# Altium PCB FPGA_Board.PcbDoc (part 8 of 10)
Units mm, origin at the board's own origin, x right, y up, seen from the top; angles counter-clockwise.
Board outline 103.63 x 86.08 mm, 2 copper layers (Top Layer, Bottom Layer); 109 components, 200 nets, 667 pads, 237 vias.
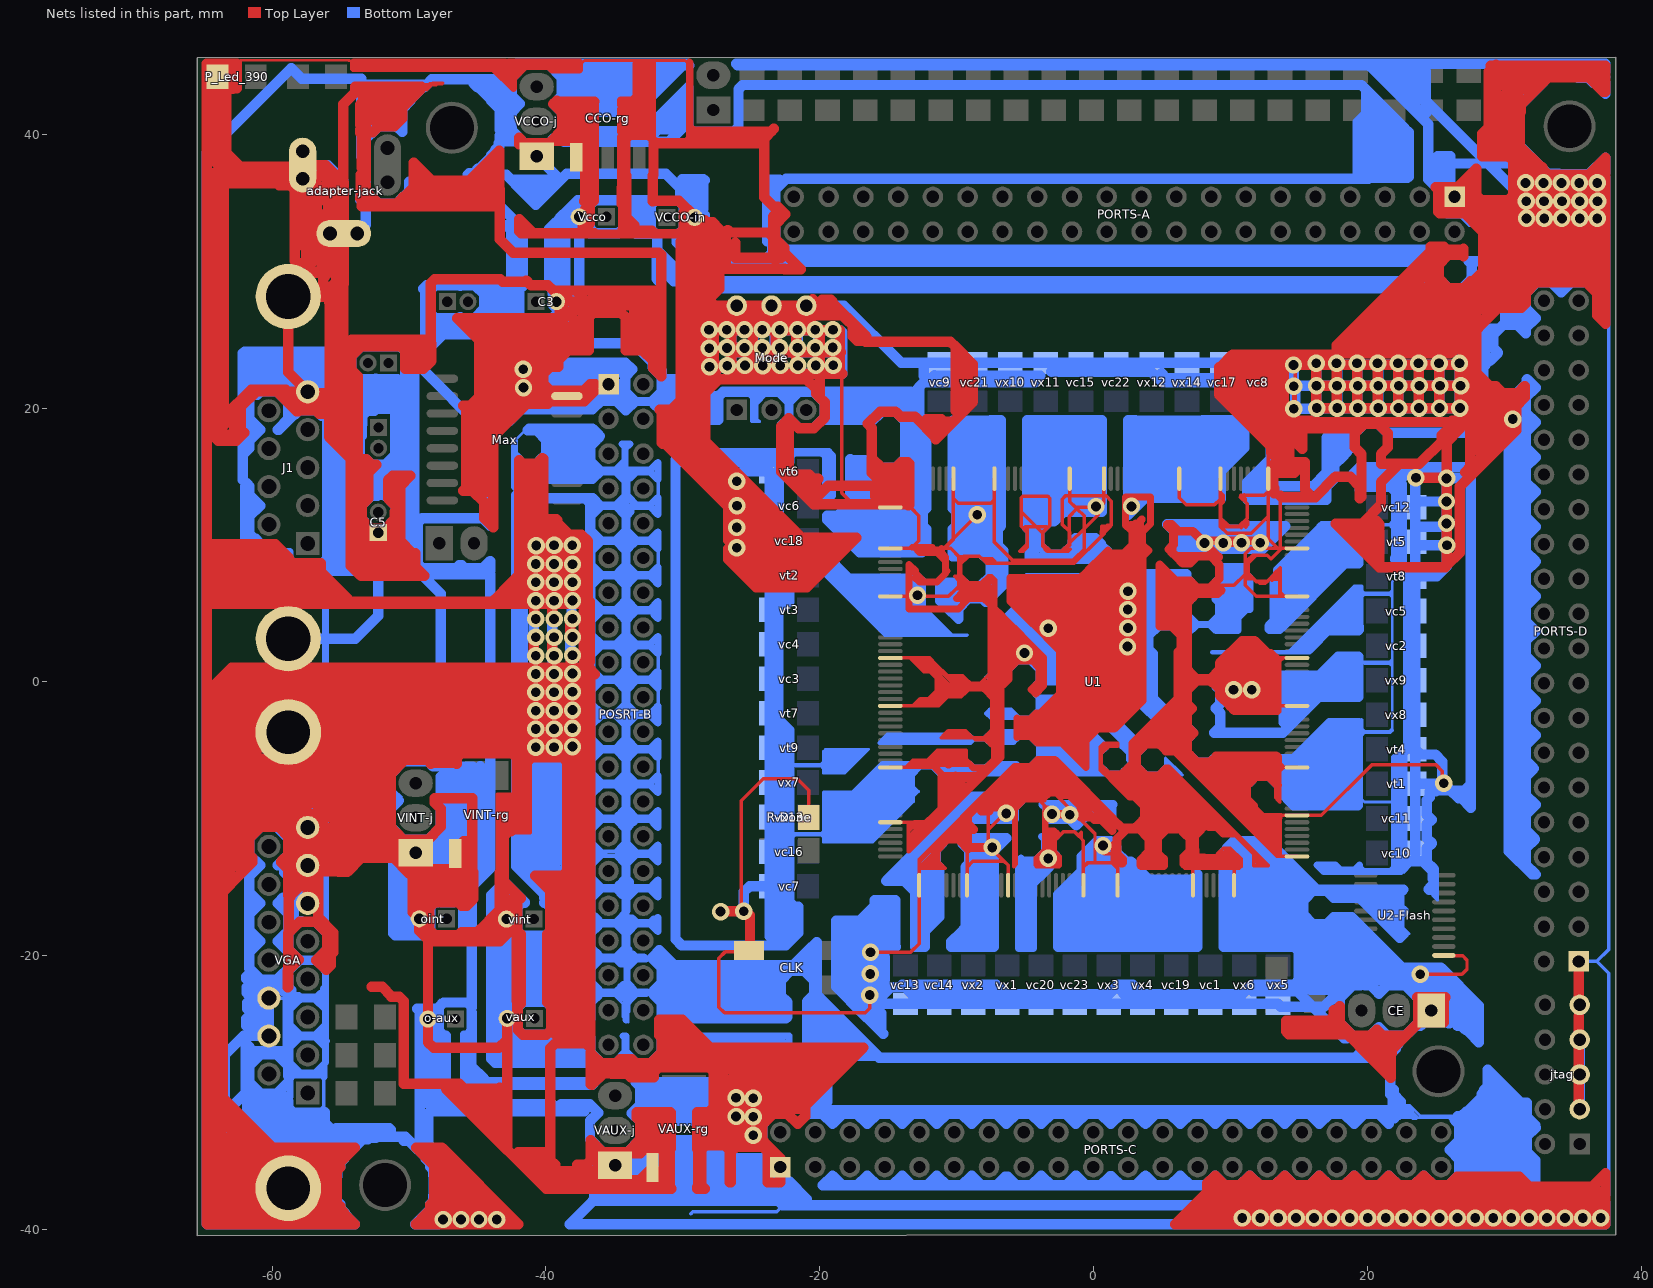
[diagram p8: the nets of this part, all layers, seen from the top]

## Via types
v1: diameter 1.27, hole 0.711, Top Layer to Bottom Layer, 237 vias

## Nets (pads, with @x,y where several pads share a name; then routed paths per layer and width w, separated by ;. In a path a pad name is that pad's centre, name@x,y a point inside that pad or via, vN(x,y) a via of type N, cw(c..) or ccw(c..) an arc to the next point about the centre after c; other vN are vias at no path point) (continued)
GND: (continued)
  Bottom Layer w0.762: -25.08,-35.398 -24.468,-34.786 ; -25.073,21.199 -24.078,21.199 ; -25.073,21.199 -24.731,20.857 -24.731,20.546 -24.078,21.199 ; v1@-24.885,25.675 v1@-23.295,25.675 ; v1@-24.885,25.675 -24.855,25.645 -24.855,24.088 ; v1@-24.858,-32.99 -24.858,-32.013 v1@-24.858,-31.852 ; v1@-24.858,-31.852 v1@-24.858,-31.82 ; v1@-24.858,-31.852 -24.89,-31.82 v1@-24.858,-31.82 ; -24.855,22.5 -24.855,24.088 ; -24.855,22.5 -23.235,22.5 ; -24.855,24.088 v1@-23.295,24.088 ; -24.707,-35.77 -24.386,-36.092 ; -24.707,-35.77 -23.723,-34.786 -24.468,-34.786 ; -24.686,-36.392 -24.386,-36.092 ; -24.686,-36.392 -25.086,-36.792 -33.035,-36.792 -33.401,-36.426 -34.62,-36.426 -34.62,-36.662 -34.293,-36.989 -33.468,-36.989 -33.193,-37.264 -24.706,-37.264 -24.706,-37.25 -23.967,-36.511 ; -24.386,-36.092 -23.967,-36.511 ; -24.144,-21.792 -23.611,-21.259 ; -24.144,-21.792 -24.677,-22.325 -29.848,-22.325 -29.762,-22.411 -29.762,-22.757 -24.216,-22.757 -24.144,-22.685 -24.144,-21.792 ; -24.144,-21.792 -24.144,-21.432 -24.475,-21.763 -30.496,-21.763 -30.395,-21.864 -30.395,-23.06 -30.151,-23.304 -23.582,-23.304 -23.611,-23.275 -23.611,-21.259 ; -24.078,21.199 -22.972,21.199 ; -23.967,-36.511 -23.672,-36.216 -23.554,-36.334 -23.122,-36.334 -23.122,-36.386 -23.607,-36.871 ; -23.967,-36.511 -23.607,-36.871 ; vc7.2@-23.65,-14.92 -23.65,-18.563 -23.42,-18.793 -23.341,-18.714 -22.945,-18.714 -22.945,-15.988 -22.498,-16.435 ; vc7.2@-23.65,-14.92 vc16.2@-23.65,-12.395 vx13.1@-23.65,-9.871 vx7.1@-23.65,-7.346 vt9.1@-23.65,-4.822 vt7.1@-23.65,-2.297 vc3.2@-23.65,0.228 vc4.2@-23.65,2.752 vt3.1@-23.65,5.277 vt2.1@-23.65,7.801 vc18.2@-23.65,9.825 ; vc18.2@-23.65,9.825 vc18.2@-23.65,10.326 vc18.2@-23.65,11.225 ; vc18.2@-23.65,11.225 vc6.2@-23.65,12.85 ; -23.611,-21.259 -23.026,-20.674 ; -23.611,-21.259 -23.611,-21.086 -23.683,-21.014 -31,-21.014 -30.986,-21.028 -30.986,-23.348 -30.266,-24.068 -30.165,-23.967 -22.948,-23.967 -22.79,-23.809 -22.79,-23.693 -23.294,-23.189 -23.28,-23.175 -23.28,-22.408 ; -23.607,-36.871 -23.423,-37.054 -23.241,-37.236 -23.409,-37.236 -23.522,-37.349 -22.882,-37.349 -22.455,-37.349 ; -23.607,35.609 -23.234,35.982 ; -23.607,35.609 -23.859,35.357 -23.859,32.185 -23.607,32.437 -23.607,35.609 ; -23.607,35.609 -23.607,36.677 -22.961,36.677 -23.234,36.404 -23.234,35.982 ; v1@-23.295,24.088 v1@-21.615,24.088 ; v1@-23.295,24.088 v1@-23.295,25.675 ; v1@-23.295,24.088 -23.295,22.56 -23.235,22.5 ; v1@-23.295,25.675 v1@-21.705,25.675 ; -23.28,-22.408 -23.28,-21.568 -22.386,-20.674 ; -23.28,-22.408 -22.856,-21.984 ; -23.235,22.5 v1@-21.615,22.5 ; -23.234,31.989 -23.234,35.982 ; -23.234,31.989 -23.234,31.812 -22.512,31.09 ; -23.234,31.989 -22.887,31.989 -22.453,31.555 24.075,31.555 ; -23.234,31.989 -23.494,31.989 -23.494,31.315 -23.691,31.118 -23.663,31.09 -22.512,31.09 ; -23.234,35.982 -22.453,36.763 20.047,36.763 20.101,36.817 22.923,36.817 23.007,36.901 22.7,37.208 22.7,37.322 ; vt7.1@-23.036,-2.72 vt3.1@-23.036,5.195 ; vt7.1@-23.036,-2.72 -22.498,-3.258 ; vt3.1@-23.036,5.195 -23.036,6.88 -22.786,7.13 -22.775,7.119 -22.775,5.455 ; vt3.1@-23.036,5.195 -22.775,5.455 ; -23.026,-20.674 -22.386,-20.674 ; -22.972,21.199 -22.693,20.92 -22.255,20.482 -21.817,20.92 -21.538,21.199 ; -22.972,21.199 -21.538,21.199 ; -22.856,-21.984 -22.856,-21.82 -22.142,-21.106 -21.954,-21.106 ; -22.512,31.09 24.284,31.09 24.284,31.146 23.975,31.455 24.075,31.555 ; -22.512,31.09 -22.344,30.922 24.873,30.922 24.873,31.396 ; -22.498,-16.435 -22.498,-3.258 ; -22.498,-3.258 -22.234,-3.522 -22.234,-5.971 -22.234,-11.048 -22.234,-16.062 -21.892,-16.404 ; -22.455,-37.349 -22.455,-36.45 -22.269,-36.45 -20.944,-37.775 -21.523,-37.775 -21.949,-37.349 -22.455,-37.349 ; -22.455,-37.349 -22.455,-37.404 -21.898,-37.961 -21.644,-38.215 ; -22.386,-20.674 -22.127,-20.674 ; -22.127,-20.674 -22.127,-20.933 -21.954,-21.106 ; -22.127,-20.674 -21.908,-20.674 -21.349,-20.115 ; -21.954,-21.106 -21.671,-21.106 ; v1@-21.705,25.675 v1@-20.115,25.675 ; v1@-21.705,25.675 -20.985,26.395 -20.985,26.545 ; v1@-21.705,25.675 -21.615,25.585 v1@-21.615,24.088 ; -21.671,-21.106 -21.349,-20.784 ; -21.671,-21.106 -21.349,-21.106 ; -21.644,-38.215 34.424,-38.215 37.192,-38.215 37.387,-38.021 v1@37.387,-38.783 ; v1@-21.615,22.5 v1@-21.615,24.088 ; v1@-21.615,22.5 -18.375,22.5 -18.375,25.525 -18.525,25.675 v1@-20.115,25.675 ; v1@-21.615,24.088 -20.341,24.088 v1@-20.115,24.088 ; -21.538,21.199 -20.432,21.199 ; -21.349,-21.106 -21.349,-20.784 ; -21.349,-21.106 -21.132,-21.106 -20.777,-21.461 ; -21.349,-20.784 -20.759,-20.194 ; -21.349,-20.784 -21.349,-20.115 ; -21.349,-20.115 -20.759,-19.525 ; -20.985,26.545 v1@-20.115,25.675 ; -20.985,26.545 Mode.4@-20.985,27.485 -18.235,27.485 -14.05,23.3 -12.395,23.3 ; -20.895,-31.561 -19.789,-31.561 ; -20.895,-31.561 -20.937,-31.603 -20.937,-23.511 -20.298,-23.511 -19.934,-23.147 ; -20.895,-31.561 -20.624,-31.29 21.862,-31.29 ; -20.777,-21.461 -20.759,-21.461 -20.759,-20.194 ; -20.759,-20.194 -20.236,-19.671 ; -20.759,-20.194 -20.759,-19.525 ; -20.759,-19.525 -20.236,-19.002 -20.236,-19.671 ; -20.432,21.199 -19.865,20.632 ; -20.432,21.199 -13.362,21.199 -13.123,20.96 -13.123,20.632 ; -20.236,-19.671 -20.236,-22.845 -19.934,-23.147 ; v1@-20.115,24.088 v1@-20.115,25.675 ; -19.934,-23.147 -15.991,-27.09 ; -19.865,20.632 -13.123,20.632 ; -19.865,20.632 -19.651,20.418 -19.651,19.303 -19.81,19.143 -16.081,19.143 -15.664,19.56 ; -19.789,-31.561 -19.072,-32.278 -18.355,-31.561 ; -19.789,-31.561 -18.355,-31.561 ; -19.456,-26.167 -18.924,-25.635 -17.352,-27.207 -18.043,-27.207 ; -19.456,-26.167 -19.583,-26.294 -19.583,-30.324 -20.017,-29.89 -20.017,-24.379 -19.788,-24.608 -19.456,-24.939 ; -19.456,-26.167 -19.456,-24.939 ; -19.456,-26.167 -19.456,-30.682 -19.992,-30.682 -20.247,-30.937 -20.247,-24.047 -20.221,-24.021 -19.711,-24.021 -16.642,-27.09 -15.991,-27.09 ; -18.355,-36.769 -19.789,-36.769 -19.072,-36.052 -18.355,-36.769 ; -18.355,-36.769 -17.249,-36.769 ; -18.355,-31.561 -17.249,-31.561 ; -18.204,11.776 -17.495,12.485 ; -18.204,11.776 -18.415,11.565 -18.415,11.545 -16.863,9.993 -13.085,9.993 -13.085,10.575 ; -18.204,11.776 -17.629,11.776 ; -18.204,11.776 -18.856,11.776 -18.147,12.485 -17.495,12.485 ; -18.043,-27.207 -18.9,-27.207 -18.949,-27.256 -18.988,-27.217 -18.988,-26.508 -18.742,-26.508 -18.043,-27.207 ; -18.043,-27.207 -17.945,-27.305 -15.776,-27.305 ; -18.035,-18.097 -18.188,-17.944 -18.476,-17.944 -18.322,-18.098 -18.322,-20.782 -17.996,-20.456 -17.996,-20.072 -18.035,-20.033 -18.035,-18.097 ; -18.035,-18.097 -17.383,-18.749 -17.383,-20.322 -18.073,-21.012 -18.399,-21.012 -18.399,-21.779 -16.846,-23.332 ; -18.035,-18.097 -18.035,-17.982 -17.115,-17.982 -16.769,-18.328 -16.769,-19.018 -16.616,-19.018 -16.232,-18.634 -16.232,-18.175 -16.597,-17.81 -15.83,-17.043 -15.791,-17.082 -15.791,-19.075 ; -17.629,11.776 -16.92,12.485 ; -17.629,11.776 -17.725,11.68 -17.687,11.68 -16.652,10.645 -13.699,10.645 -13.449,10.895 -13.449,10.939 ; -17.629,11.776 -16.728,11.776 ; -17.495,12.485 -16.92,12.485 ; -17.495,12.485 -17.437,12.543 -17.437,15.573 -17.342,15.668 -16.479,15.668 -16.383,15.572 -14.504,15.572 -14.063,15.131 -13.449,15.745 ; -17.249,-36.769 -15.815,-36.769 ; -17.249,-36.769 -16.532,-36.052 -15.815,-36.769 ; -17.249,-31.561 -16.532,-32.278 -15.815,-31.561 ; -17.249,-31.561 -15.815,-31.561 ; v1@-16.923,-21.357 -16.923,-20.552 -16.846,-20.475 -16.846,-19.746 -16.961,-19.631 -16.961,-20.513 -17.824,-21.376 -17.824,-21.664 -17.364,-22.124 -17.364,-21.377 -17.306,-21.319 -16.961,-21.319 v1@-16.923,-21.357 ; v1@-16.923,-21.357 v1@-16.325,-21.955 ; v1@-16.923,-21.357 -16.923,-21.932 -16.846,-22.009 -16.846,-23.332 ; -16.92,12.485 -16.46,12.485 ; -16.92,12.485 -16.881,12.524 -16.881,15.131 -16.498,14.748 -16.46,14.748 ; -16.846,-24.223 -16.846,-23.332 ; -16.846,-24.223 -18.814,-22.255 -18.814,-17.47 -18.788,-17.444 -17.07,-17.444 -15.983,-16.357 -15.983,-15.961 -14.486,-15.961 -14.486,-19.303 -14.453,-19.336 -14.887,-19.336 -15.201,-19.65 -15.35,-19.65 -15.35,-19.305 -14.89,-18.845 -14.89,-16.583 -15.331,-16.583 -15.408,-16.506 -15.408,-18.768 -15.715,-19.075 -15.791,-19.075 ; -16.846,-24.223 -16.094,-24.976 ; -16.728,11.776 -16.575,11.929 -16.498,11.929 -16.46,11.967 -16.46,12.485 ; -16.728,11.776 -16.958,11.546 -16.671,11.546 -16.402,11.277 -13.832,11.277 -13.679,11.124 -13.679,11.169 ; -16.728,11.776 -14.286,11.776 -13.679,11.169 ; -16.46,12.485 -16.46,14.748 ; -16.46,12.485 -16.076,12.485 ; -16.46,14.748 -13.948,14.748 -14.542,15.342 -16.364,15.342 -16.46,15.246 -16.46,14.748 ; v1(-16.35,-22.875) v1@-16.094,-23.131 ; v1(-16.35,-22.875) -16.35,-23.885 -16.156,-24.079 -16.094,-24.079 ; v1(-16.35,-22.875) -16.325,-22.85 v1@-16.325,-21.955 ; v1@-16.325,-21.955 -16.094,-22.186 ; -16.094,-24.976 -15.523,-25.546 ; -16.094,-24.976 -16.094,-24.079 ; -16.094,-24.079 v1@-16.094,-23.131 ; -16.094,-24.079 -15.638,-24.079 -15.523,-24.194 -15.523,-25.546 ; v1@-16.094,-23.131 -16.094,-22.186 ; v1@-16.094,-23.131 -15.705,-23.52 vc13.2@-13.742,-23.52 vc14.2@-11.269,-23.52 vx2.1@-8.795,-23.52 vx1.1@-6.322,-23.52 vc20.2@-3.848,-23.52 vc23.2@-1.375,-23.52 vx3.1@1.099,-23.52 vx4.1@3.572,-23.52 vc19.2@6.045,-23.52 vc1.2@8.519,-23.52 vx6.1@10.992,-23.52 vx5.1@13.466,-23.52 13.671,-23.725 16.012,-23.725 ; -16.094,-22.186 -16.094,-20.318 v1@-15.791,-20.015 ; -16.094,-22.186 -15.791,-22.489 ; -16.076,12.485 -16.076,14.019 -15.846,14.249 -13.909,14.249 -13.679,14.019 -13.679,11.169 ; -16.076,12.485 -16.076,11.91 -15.98,11.814 -14.216,11.814 -14.216,13.464 -14.14,13.54 -14.293,13.693 -15.501,13.693 -15.501,12.485 ; -16.076,12.485 -15.501,12.485 ; -15.991,-27.09 -15.776,-27.305 ; -15.815,-36.769 -14.709,-36.769 ; -15.815,-31.561 -14.709,-31.561 ; -15.791,-22.489 v1@-15.791,-20.015 ; -15.791,-22.489 -15.6,-22.68 -15.6,-22.814 -15.332,-22.814 -15.044,-22.526 -15.255,-22.315 ; v1@-15.791,-20.015 -15.791,-19.075 ; -15.776,-27.305 -15.645,-27.436 19.095,-27.436 ; -15.664,19.56 -19.297,19.56 -19.144,19.713 -19.144,20.02 -19.049,19.925 -13.545,19.925 -13.123,20.347 ; -15.664,19.56 -15.48,19.744 -14.47,19.744 ; -15.501,12.485 -15.501,12.389 -15.558,12.332 -15.462,12.236 -14.696,12.236 -14.696,13.309 -14.676,13.329 -15.003,13.329 -15.041,13.291 -15.041,12.561 -15.117,12.485 -15.501,12.485 ; -15.255,-22.315 -13.763,-22.315 -13.969,-22.109 -7.097,-22.109 -6.716,-22.489 ; -14.92,-14.308 -14.665,-14.052 ; -14.92,-14.308 -13.582,-14.308 ; -14.92,-14.308 -15.151,-14.539 -13.83,-14.539 ; -14.709,-36.769 -13.275,-36.769 ; -14.709,-36.769 -13.992,-36.052 -13.275,-36.769 ; -14.709,-31.561 -13.992,-32.278 -13.275,-31.561 ; -14.709,-31.561 -13.275,-31.561 ; -14.665,-14.052 -14.578,-14.139 -13.413,-14.139 ; -14.665,-14.052 -14.271,-13.658 ; -14.47,19.744 -13.756,19.03 -13.756,16.345 -14.47,15.631 -15.537,15.631 -16.095,16.189 -17.67,16.189 -17.764,16.283 -17.764,13.055 -18.68,12.139 -19.466,12.139 -19.466,11.856 -17.075,9.465 -12.534,9.465 -12.405,9.594 -12.215,9.594 -12.469,9.848 -12.469,9.959 ; -14.47,19.744 -13.767,19.744 -12.855,18.832 -12.855,12.063 -13.085,11.833 -13.085,10.575 ; -14.271,-13.658 -13.975,-13.363 ; -14.271,-13.658 -12.933,-13.658 ; -13.975,-13.363 -12.637,-13.363 ; -13.975,-13.363 -13.653,-13.041 ; -13.83,-14.539 -13.031,-15.338 -13.031,-19.336 -12.315,-19.336 -12.315,-18.175 -11.29,-17.15 -11.29,-13.534 -11.544,-13.28 -11.544,-12.27 ; -13.83,-14.539 -13.813,-14.539 -13.582,-14.308 ; -13.679,11.169 -13.449,10.939 ; -13.653,-13.041 -12.315,-13.041 ; -13.653,-13.041 -13.161,-12.549 ; -13.582,-14.308 -13.413,-14.139 ; -13.449,10.939 -13.449,15.745 ; -13.449,10.939 -13.085,10.575 ; -13.449,15.745 -13.334,15.86 -13.334,18.64 -13.449,18.525 -13.449,15.745 ; -13.413,-14.139 -12.933,-13.658 ; -13.413,-14.139 -12.904,-14.139 -12.369,-14.674 -12.369,-14.266 -11.918,-13.815 -11.918,-16.489 -12.481,-17.052 ; -13.275,-36.769 -12.169,-36.769 ; -13.275,-31.561 -12.169,-31.561 ; -13.161,-12.549 -12.031,-12.549 -12.115,-12.633 -12.115,-12.841 ; -13.161,-12.549 -12.654,-12.042 ; -13.123,20.347 -12.734,20.736 ; -13.123,20.347 -13.123,20.632 ; -13.123,20.347 -13.123,19.752 -12.734,20.141 ; -13.123,20.632 -12.856,20.632 -12.856,21.42 -12.734,21.542 ; -13.085,10.575 -12.469,9.959 ; -12.933,-13.658 -12.637,-13.363 ; -12.933,-13.658 -12.822,-13.658 -12.594,-13.886 -12.51,-13.886 -12.087,-13.463 -12.187,-13.363 -12.637,-13.363 ; -12.734,20.141 -12.734,20.736 ; -12.734,20.141 -12.734,19.433 -12.392,19.091 ; -12.734,20.736 -12.734,21.542 ; -12.734,21.542 -12.392,21.884 -12.154,21.884 ; -12.654,-12.042 -12.045,-12.042 -12.045,-11.563 -12.353,-11.871 -12.484,-11.871 ; -12.654,-12.042 -12.484,-11.871 ; -12.637,-13.363 -12.315,-13.041 ; -12.484,-11.871 -9.586,-8.974 ; -12.481,-17.052 -12.707,-17.278 -12.707,-18.192 -11.876,-17.361 -11.876,-16.883 -12.481,-17.488 -12.481,-17.052 ; -12.469,9.959 -12.469,11.42 ; -12.469,9.959 -12.215,9.705 -12.215,11.166 -12.469,11.42 ; -12.469,11.42 -12.469,12.43 ; -12.469,12.43 -12.215,12.684 -12.215,12.696 ; -12.469,12.43 -12.469,12.442 -12.215,12.696 ; -12.395,23.3 -12.395,22.367 -12.289,22.261 -12.033,22.005 ; -12.395,23.3 vc9.2@-11.25,23.3 vc21.2@-8.669,23.3 vx10.1@-6.089,23.3 vx11.1@-3.508,23.3 vc15.2@-0.928,23.3 vc22.2@1.653,23.3 vx12.1@4.233,23.3 vx14.1@6.814,23.3 vc17.2@9.394,23.3 vc8.2@11.975,23.3 14.45,23.3 v1(14.6,23.15) ; -12.392,19.091 -12.215,18.914 ; -12.392,19.091 -12.215,19.091 -12.215,18.914 ; -12.315,-13.041 -12.115,-12.841 ; -12.315,-13.041 -12.115,-13.041 -12.115,-12.841 ; -12.215,12.696 -12.215,18.914 ; -12.169,-36.769 -10.735,-36.769 ; -12.169,-36.769 -11.452,-36.052 -10.735,-36.769 ; -12.169,-31.561 -11.452,-32.278 -10.735,-31.561 ; -12.169,-31.561 -10.735,-31.561 ; -12.154,21.884 -12.033,22.005 ; -12.154,21.884 -11.912,21.884 ; -12.115,-12.841 -11.544,-12.27 ; -12.033,22.005 -11.912,21.884 ; -12.033,22.005 -11.625,22.413 -11.564,22.352 -3.904,22.352 -4.311,21.945 -4.311,21.884 -11.912,21.884 ; -11.544,-12.27 -11.544,-11.388 -11.036,-10.88 ; -11.544,-12.27 -11.06,-11.786 -11.06,-11.563 -11.036,-11.539 -11.036,-10.88 ; -11.036,-10.88 -10.145,-9.989 ; -10.735,-36.769 -9.629,-36.769 ; -10.735,-31.561 -9.629,-31.561 ; -10.693,5.424 -9.869,4.6 -9.869,5.38 -9.155,6.094 ; -10.693,5.424 -11.189,5.92 -11.189,7.26 -9.509,7.26 -9.255,7.006 -9.111,7.006 ; -10.693,5.424 -9.579,6.537 ; -10.316,-18.906 -9.886,-19.336 ; -10.316,-18.906 -10.284,-18.874 ; -10.284,-18.874 -8.875,-18.874 ; -10.284,-18.874 -9.793,-18.383 ; -10.145,-9.989 -5.844,-9.989 -5.844,-9.145 -5.336,-8.637 -5.336,-8.393 -9.005,-8.393 -9.586,-8.974 ; -9.902,9.19 -10.285,9.19 -10.285,11.156 -10.031,11.41 -10.031,12.43 -10.285,12.684 -10.285,19.091 -9.009,19.091 ; -9.902,9.19 -9.509,9.19 ; -9.902,9.19 -9.648,9.444 -9.509,9.444 ; -9.902,9.19 -9.902,18.863 -9.509,18.47 -9.509,9.444 ; -9.886,-19.336 -8.875,-19.336 ; -9.793,-18.383 -8.875,-18.383 ; -9.793,-18.383 -9.36,-17.95 ; -9.629,-36.769 -8.195,-36.769 ; -9.629,-36.769 -8.912,-36.052 -8.195,-36.769 ; -9.629,-31.561 -8.912,-32.278 -8.195,-31.561 ; -9.629,-31.561 -8.195,-31.561 ; -9.579,6.537 -9.513,6.471 -9.095,6.471 -9.067,6.499 -8.75,6.499 ; -9.579,6.537 -9.31,6.806 ; -9.509,9.19 -9.509,9.444 ; -9.509,9.19 -9.255,9.444 ; -9.509,9.444 -9.255,9.444 ; -9.36,-17.95 -9.36,-13.534 -9.106,-13.28 -9.106,-12.27 -9.555,-11.82 -9.555,-11.411 -6.376,-11.411 v1@-7.287,-12.322 ; -9.36,-17.95 -9.287,-17.877 -8.875,-17.877 ; -9.31,6.806 -8.443,6.806 ; -9.31,6.806 -9.111,7.006 ; -9.255,9.444 -8.867,9.444 ; -9.155,6.094 -8.145,6.094 -7.891,5.84 -7.85,5.84 -6.883,6.806 ; -9.155,6.094 -8.75,6.499 ; -9.111,7.006 -8.245,7.006 -7.531,7.72 -7.531,8.73 -7.6,8.799 ; -9.009,19.091 -9.009,9.586 -8.867,9.444 ; -9.009,19.091 -7.533,19.091 -7.508,19.116 -6.765,19.116 -6.765,11.394 -7.019,11.14 -7.019,9.995 -6.59,9.566 -6.59,7.1 -6.883,6.806 ; -9.009,19.091 -8.486,18.568 -8.486,9.949 -8.382,9.845 -7.641,9.845 -7.641,10.424 ; -8.875,-19.336 -8.875,-18.874 ; -8.875,-19.336 -7.287,-19.336 -7.287,-13.068 ; -8.875,-18.874 -8.875,-18.383 ; -8.875,-18.874 -7.958,-18.874 -7.958,-18.629 -7.712,-18.383 -8.875,-18.383 ; -8.875,-18.383 -8.875,-17.877 ; -8.875,-17.877 -8.875,-12.028 -8.991,-11.912 -8.261,-11.912 -8.261,-13.296 ; -8.875,-17.877 -7.864,-17.877 -7.864,-13.645 ; -8.867,9.444 -8.245,9.444 ; -8.75,6.499 -8.23,6.499 -8.078,6.651 -7.793,6.651 -7.638,6.806 ; -8.75,6.499 -8.443,6.806 ; -8.443,6.806 -7.638,6.806 ; -8.326,-13.361 -8.261,-13.296 ; -8.326,-13.361 -8.456,-13.491 -8.456,-17.632 -8.261,-17.437 -8.261,-13.703 ; -8.326,-13.361 -8.326,-13.703 -8.261,-13.703 ; -8.261,-13.703 -8.261,-13.296 ; -8.261,-13.703 -7.922,-13.703 -7.864,-13.645 ; -8.261,-13.296 -7.864,-12.899 ; -8.245,9.444 -7.687,9.444 -7.47,9.227 -7.251,9.227 -7.27,9.246 -7.27,10.5 ; -8.245,9.444 -7.6,8.799 ; -8.195,-36.769 -7.089,-36.769 ; -8.195,-31.561 -7.089,-31.561 ; -7.864,-13.645 -7.864,-12.899 ; -7.864,-13.645 -7.287,-13.068 ; -7.864,-12.899 v1@-7.414,-12.449 ; -7.641,10.424 -7.641,18.806 -7.622,18.825 -8.163,18.825 -8.173,18.815 -8.173,10.044 -8.097,9.968 -7.641,10.424 ; -7.641,10.424 -7.565,10.5 -7.27,10.5 ; -7.638,6.806 -6.883,6.806 ; -7.638,6.806 -7.251,7.193 -7.251,7.554 -6.909,7.896 -6.909,8.162 -6.994,8.247 -6.994,8.799 ; -7.6,8.799 -6.994,8.799 ; v1@-7.414,-12.449 -7.414,-12.825 -7.287,-12.952 ; v1@-7.414,-12.449 v1@-7.287,-12.322 ; -7.287,-13.068 -7.287,-12.952 ; -7.287,-12.952 v1@-7.287,-12.322 ; -7.27,10.5 -7.27,18.91 -7.175,18.815 -7.175,10.5 -7.27,10.5 ; -7.089,-36.769 -5.655,-36.769 ; -7.089,-36.769 -6.458,-36.138 -6.286,-36.138 -5.655,-36.769 ; -7.089,-31.561 -6.372,-32.278 -5.655,-31.561 ; -7.089,-31.561 -5.655,-31.561 ; -6.994,8.799 -6.956,8.799 -6.994,8.837 -6.994,8.799 ; -6.716,-22.489 -13.405,-22.489 -13.513,-22.597 -13.299,-22.811 vx1.1@-6.395,-22.811 ; -6.716,-22.489 vx1.1@-6.395,-22.811 ; -6.414,2.541 -6.414,3.911 ; -6.414,2.541 -6.414,1.654 -6.414,1.255 -6.693,0.976 -7.086,0.584 -7.072,0.584 -6.693,0.963 -5.987,1.669 -4.595,1.669 -4.094,1.168 ; -6.414,2.541 -5.587,2.541 ; -6.414,3.911 -6.414,4.546 ; -6.414,3.911 -6.732,4.229 -6.414,4.546 ; -6.414,4.546 -4.66,6.3 ; vx1.1@-6.395,-22.811 -3.848,-22.811 1.095,-22.811 1.797,-22.109 2.861,-22.109 2.861,-22.192 3.122,-22.453 ; -5.655,-36.769 -4.549,-36.769 ; -5.655,-31.561 -4.549,-31.561 ; -5.587,2.541 -5.587,3.19 ; -5.587,2.541 -5.54,2.541 -4.526,3.555 ; -5.587,3.19 -5.587,4.645 -5.869,4.363 -5.869,4.307 -5.86,4.298 -5.86,3.095 -5.682,3.095 -5.587,3.19 ; -5.587,3.19 -5.108,3.669 -5.108,5.162 -5.033,5.237 -4.911,5.237 -4.526,5.622 -4.526,3.555 ; -4.66,6.3 -4.66,7.575 -0.106,7.575 -0.411,7.27 -0.411,0.126 -3.881,0.126 -3.881,0.733 ; -4.66,6.3 -4.032,6.928 -0.946,6.928 -0.937,6.937 -0.937,0.633 -3.05,0.633 -3.248,0.831 -2.985,1.094 -1.538,1.094 -1.538,6.26 -1.576,6.298 -2.017,6.298 -2.017,1.602 -2.046,1.573 -2.834,1.573 -2.844,1.563 -2.844,1.723 -2.506,2.061 -2.506,6.392 -2.572,6.458 -2.647,6.383 -3.051,6.383 -3.051,2.268 -3.211,2.108 -3.211,1.628 -3.539,1.3 -3.539,3.617 v1@-3.539,3.911 ; -4.66,9.634 -4.66,9.837 ; -4.66,9.634 -4.66,9.263 -4.627,9.23 ; -4.66,9.634 -4.531,9.634 -4.377,9.48 -4.627,9.23 ; -4.66,9.837 -4.581,9.916 -4.581,9.995 ; -4.66,9.837 -4.66,9.916 -4.581,9.995 ; -4.627,9.23 -4.66,9.197 -4.66,9.116 -4.59,9.046 -4.443,9.046 ; -4.627,9.23 -4.443,9.046 ; -4.581,9.995 -4.581,11.169 ; -4.581,11.169 -4.625,11.213 -4.581,11.257 ; -4.581,11.169 -4.581,11.257 ; -4.581,11.257 -3.969,11.869 ; -4.581,11.257 -4.581,11.513 ; -4.581,11.513 -4.114,11.98 -4.114,14.417 ; -4.581,11.513 -4.835,11.259 -4.835,19.116 0.585,19.116 ; -4.581,11.513 -4.581,13.95 -4.114,14.417 ; -4.549,-36.769 -3.115,-36.769 ; -4.549,-36.769 -3.832,-36.052 -3.115,-36.769 ; -4.549,-31.561 -3.832,-32.278 -3.115,-31.561 ; -4.549,-31.561 -3.115,-31.561 ; -4.526,3.555 -4.526,2.63 -4.526,2.324 -4.094,1.892 ; -4.526,3.555 -4.17,3.911 -4.094,3.911 ; -4.443,9.046 -4.394,8.997 0.623,8.997 ; -4.443,9.046 -1.56,9.046 -1.56,9.262 -1.541,9.281 ; -4.114,14.417 -4.114,18.226 -4.393,18.505 -0.026,18.505 ; -4.114,14.417 -3.588,14.943 ; -4.094,1.168 -4.094,1.892 ; -4.094,1.168 -3.881,0.955 -3.881,0.733 ; -4.094,1.892 -4.094,3.062 -4.094,3.911 ; -4.094,3.911 -4.094,6.063 -4.028,6.129 -3.812,6.129 -3.577,6.364 -3.539,6.326 v1@-3.539,3.911 ; -4.094,3.911 v1@-3.539,3.911 ; -3.969,11.005 -3.969,11.869 ; -3.969,11.005 -3.255,11.719 ; -3.969,11.005 -3.969,9.995 -3.255,9.281 -2.245,9.281 ; -3.969,11.869 -3.969,12.415 -3.588,12.796 ; -3.969,11.869 -3.696,12.142 -3.108,12.142 -2.197,13.053 ; -3.588,12.796 -3.588,14.943 ; -3.588,12.796 -3.588,12.731 -3.122,12.731 -2.21,13.643 ; -3.588,12.796 -2.21,14.174 ; -3.588,14.943 -3.588,17.886 -3.603,17.901 -1.869,17.901 ; -3.588,14.943 -3.108,15.423 ; -3.255,11.719 -2.896,11.719 -2.2,12.415 ; -3.255,11.719 -2.559,12.415 -2.2,12.415 ; -3.115,-36.769 -2.009,-36.769 ; -3.115,-31.561 -2.009,-31.561 ; -3.108,15.423 -3.108,17.266 -3.045,17.329 -1.869,17.329 ; -3.108,15.423 -3.108,13.505 -2.381,14.232 -2.21,14.232 ; -3.108,15.423 -2.659,15.872 ; -2.659,15.872 -2.659,16.756 -2.628,16.787 -1.869,16.787 ; -2.659,15.872 -2.659,14.836 -2.597,14.774 -2.21,14.774 ; -2.659,15.872 -1.869,16.662 ; -2.585,-19.341 -2.58,-19.336 -2.517,-19.336 ; -2.585,-19.341 -2.522,-19.341 -2.517,-19.336 ; -2.585,-19.341 -2.585,-15.55 -0.86,-13.825 -0.86,-12.775 ; -2.517,-19.336 -1.939,-19.336 ; -2.245,9.281 -1.531,9.995 ; -2.245,9.281 -1.602,9.281 ; -2.21,13.643 -2.21,14.174 ; -2.21,13.643 -2.21,13.065 -2.197,13.053 ; -2.21,13.643 -2.039,13.814 -1.885,13.66 -0.011,13.66 -0.011,18.459 0.035,18.505 -0.026,18.505 ; -2.21,14.174 -2.21,14.232 ; -2.21,14.174 -2.181,14.203 ; -2.21,14.232 -2.21,14.774 ; -2.21,14.232 -2.181,14.203 ; -2.21,14.774 -1.869,14.774 ; -2.21,14.774 -2.21,16.307 -2.132,16.229 -2.132,15.285 -1.869,15.285 ; -2.2,12.415 -1.88,12.735 ; -2.2,12.415 -1.56,12.415 ; -2.197,13.053 -1.88,12.735 ; -2.197,13.053 -2.117,13.133 0.399,13.133 0.585,13.319 ; -2.181,14.203 -2.164,14.186 -0.615,14.186 -0.6,14.201 -0.6,17.886 -0.615,17.901 -0.63,17.901 ; -2.181,14.203 -1.869,14.515 -1.869,14.774 ; -2.009,-36.769 -0.575,-36.769 ; -2.009,-36.769 -1.318,-36.077 -1.266,-36.077 -0.575,-36.769 ; -2.009,-31.561 -1.292,-32.278 -0.575,-31.561 ; -2.009,-31.561 -0.575,-31.561 ; -1.939,-19.336 -1.358,-19.336 ; -1.939,-19.336 -1.939,-15.883 -2.013,-15.809 -0.702,-14.498 -0.66,-14.498 -0.406,-14.244 -0.406,-13.218 -0.332,-13.144 0.281,-13.144 ; -1.88,12.735 -1.56,12.415 ; -1.869,14.774 -1.869,15.285 ; -1.869,14.774 -1.033,14.774 -1.095,14.836 -1.095,17.329 -1.202,17.329 ; -1.869,15.285 -1.56,15.285 -1.699,15.424 -1.699,16.787 -1.744,16.787 ; -1.869,15.285 -1.869,16.662 ; -1.869,16.662 -1.869,16.787 ; -1.869,16.662 -1.744,16.787 ; -1.869,16.787 -1.744,16.787 ; -1.869,16.787 -1.869,17.329 ; -1.869,17.329 -1.202,17.329 ; -1.869,17.329 -1.869,17.901 ; -1.869,17.901 -0.63,17.901 ; -1.744,16.787 -1.202,17.329 ; -1.602,9.281 -0.398,10.485 ; -1.602,9.281 -1.541,9.281 ; -1.56,12.415 0.585,12.415 0.585,13.319 ; -1.541,9.281 -0.909,9.913 -0.599,9.913 ; -1.541,9.281 -1.231,9.281 -0.599,9.913 ; -1.531,9.995 -1.041,10.485 ; -1.531,9.995 -1.531,10.281 -1.327,10.485 -1.041,10.485 ; -1.358,-19.336 6.784,-19.336 ; -1.358,-19.336 -1.337,-19.315 -1.337,-15.809 0.281,-14.191 0.281,-13.144 ; -1.202,17.329 -0.63,17.901 ; -1.041,10.485 -0.398,10.485 ; -0.86,-12.775 -0.599,-12.514 ; -0.86,-12.775 -0.66,-12.975 0.45,-12.975 ; -0.63,17.901 -0.026,18.505 ; -0.599,-12.514 0.729,-12.514 0.68,-12.465 v1@0.68,-12.071 ; -0.599,-12.514 -0.131,-12.046 ; -0.599,9.913 -0.398,10.114 ; -0.599,9.913 -0.585,9.913 ; -0.585,9.913 -0.398,10.1 -0.398,10.114 ; -0.585,9.913 -0.755,9.743 -0.12,9.743 ; -0.585,9.913 -0.29,9.913 -0.12,9.743 ; -0.575,-36.769 0.531,-36.769 ; -0.575,-31.561 0.531,-31.561 ; -0.398,10.114 -0.398,10.485 ; -0.398,10.114 -0.027,10.485 ; -0.398,10.485 -0.027,10.485 ; -0.131,-12.046 -0.105,-12.071 v1@0.68,-12.071 ; -0.12,9.743 -0.089,9.712 -0.089,9.709 0.623,8.997 ; -0.12,9.743 -0.076,9.743 0.668,8.998 ; -0.027,10.485 0.125,10.485 0.506,10.104 0.506,9.995 1.085,9.415 0.668,8.998 ; -0.026,18.505 0.585,19.116 ; 0.281,-13.144 0.45,-12.975 ; 0.45,-12.975 1.354,-12.071 ; 0.45,-12.975 1.613,-12.975 3.728,-15.09 7.112,-15.09 7.112,-16.898 ; 0.531,-36.769 1.965,-36.769 ; 0.531,-36.769 1.203,-36.096 1.293,-36.096 1.965,-36.769 ; 0.531,-31.561 1.248,-32.278 1.965,-31.561 ; 0.531,-31.561 1.965,-31.561 ; 0.585,13.319 0.585,19.116 ; 0.623,8.997 0.667,8.997 ; 0.667,8.997 0.668,8.998 ; 0.667,8.997 0.67,8.997 0.668,8.998 ; v1@0.68,-12.071 1.354,-12.071 ; 1.354,-12.071 1.656,-12.071 1.656,-12.43 2.37,-13.144 2.729,-13.144 4.025,-14.44 7.175,-14.44 7.554,-14.061 7.554,-16.782 ; 1.965,-36.769 3.071,-36.769 ; 1.965,-31.561 3.071,-31.561 ; 2.473,-0.521 2.473,0.022 ; 2.473,-0.521 5.916,-3.964 6.423,-3.964 ; 2.473,-0.521 1.468,0.484 1.468,6.321 2.473,7.326 ; 2.473,0.022 v1(2.473,2.58) ; 2.473,0.022 1.985,0.51 1.985,6.13 v1@2.473,6.618 ; 2.473,0.022 3.234,-0.739 3.234,5.553 ; v1(2.473,2.58) v1@2.473,4.932 ; v1@2.473,4.932 v1@2.473,6.618 ; v1@2.473,4.932 3.094,5.553 3.234,5.553 ; v1@2.473,6.618 3.051,7.196 6.232,7.196 6.372,7.336 6.669,7.039 6.669,4.33 6.538,4.461 4.414,4.461 3.706,3.753 3.706,-1.193 6.45,-3.937 6.423,-3.964 ; v1@2.473,6.618 2.473,7.326 ; 2.473,7.326 3.004,7.857 6.764,7.857 6.764,7.562 7.06,7.266 7.06,6.059 6.806,5.805 6.806,4.795 7.401,4.2 7.066,3.865 5.984,3.865 5.73,4.119 4.72,4.119 4.006,3.405 4.006,2.395 4.329,2.072 4.329,-1.177 6.638,-3.486 7.012,-3.486 7.251,-3.725 7.012,-3.964 6.423,-3.964 ; 3.071,-36.769 4.505,-36.769 ; 3.071,-36.769 3.788,-36.052 4.505,-36.769 ; 3.071,-31.561 3.788,-32.278 4.505,-31.561 ; 3.071,-31.561 4.505,-31.561 ; 3.122,-22.453 vx4.1@3.48,-22.811 ; 3.122,-22.453 1.893,-22.453 2.251,-22.811 vx4.1@3.48,-22.811 ; 3.234,5.553 3.733,5.553 ; 3.234,5.553 3.234,6.533 3.165,6.602 3.253,6.69 6.267,6.69 6.267,5.143 6.066,4.942 4.31,4.942 3.768,4.4 3.733,4.435 3.733,5.553 ; vx4.1@3.48,-22.811 10.87,-22.811 11.536,-22.145 11.536,-22.109 14.642,-22.109 14.984,-21.767 14.984,-19.683 14.637,-19.336 9.484,-19.336 9.484,-12.49 9.744,-12.23 9.744,-12.12 10.221,-11.643 12.741,-11.643 16.259,-15.161 22.615,-15.161 22.331,-15.445 22.331,-16.455 ; 3.733,5.553 3.733,6.078 5.594,6.078 5.777,6.261 5.777,5.413 5.734,5.37 4.361,5.37 4.178,5.553 3.733,5.553 ; 4.505,-36.769 5.611,-36.769 ; 4.505,-31.561 5.611,-31.561 ; 5.261,-16.898 5.959,-16.898 ; 5.261,-16.898 2.597,-16.898 2.121,-16.422 2.079,-16.464 2.079,-16.729 1.994,-16.814 1.487,-16.814 1.645,-16.656 1.645,-16.158 1.455,-16.158 0.842,-16.771 0.842,-17.173 0.662,-17.353 5.504,-17.353 5.61,-17.247 5.261,-16.898 ; 5.261,-16.898 5.261,-16.391 5.197,-16.327 2.66,-16.327 1.793,-15.46 1.476,-15.46 0.281,-16.655 0.292,-16.666 0.292,-17.818 0.324,-17.85 6.044,-17.85 5.959,-17.765 5.959,-16.898 ; 5.611,-36.769 7.045,-36.769 ; 5.611,-36.769 6.328,-36.052 7.045,-36.769 ; 5.611,-31.561 6.328,-32.278 7.045,-31.561 ; 5.611,-31.561 7.045,-31.561 ; 5.915,16.323 6.381,16.323 5.869,15.811 5.869,15.183 4.915,15.183 4.601,15.497 4.601,16.695 4.752,16.846 6.438,16.846 ; 5.915,16.323 4.974,16.323 4.962,16.311 4.962,15.928 5.207,15.683 5.357,15.683 5.508,15.834 5.508,15.916 5.915,16.323 ; 5.915,16.323 6.438,16.846 ; 5.959,-16.898 6.467,-16.898 ; 5.959,-16.898 5.959,-16.179 5.652,-15.872 2.893,-15.872 1.286,-14.265 1.286,-14.91 -0.237,-16.433 -0.237,-18.273 -0.1,-18.41 6.562,-18.41 6.467,-18.315 6.467,-16.898 ; 6.438,16.846 7.66,16.846 ; 6.438,16.846 7.008,17.416 ; 6.467,-16.898 6.467,-15.703 6.383,-15.619 3.454,-15.619 1.371,-13.536 0.736,-13.536 0.863,-13.663 0.863,-14.54 -0.639,-16.042 -0.808,-16.042 -0.808,-18.822 -0.776,-18.854 7.048,-18.854 7.112,-18.79 7.112,-16.898 ; 6.467,-16.898 7.112,-16.898 ; 6.784,-19.336 7.554,-18.566 ; 6.784,-19.336 7.554,-19.336 7.554,-18.566 ; 7.008,17.416 8.963,17.416 7.172,15.625 7.172,14.381 6.974,14.183 3.671,14.183 3.671,17.777 3.636,17.812 3.729,17.905 9.765,17.905 9.591,17.731 9.591,17.66 ; 7.008,17.416 4.356,17.416 4.171,17.231 4.171,14.741 6.566,14.741 6.613,14.694 6.625,14.706 6.625,15.811 7.66,16.846 ; 7.008,17.416 7.252,17.66 9.591,17.66 ; 7.045,-36.769 8.151,-36.769 ; 7.045,-31.561 8.151,-31.561 ; 7.112,-16.898 7.438,-16.898 7.554,-16.782 ; 7.2,-5.894 7.52,-5.894 ; 7.2,-5.894 6.692,-5.386 7.012,-5.386 7.52,-5.894 ; 7.2,-5.894 8.133,-6.827 ; 7.334,9.736 5.635,9.736 5.894,9.995 5.894,11.005 5.389,11.51 9.366,11.51 9.745,11.131 10.755,11.131 11.009,11.385 13.995,11.385 13.401,10.791 ; 7.554,-18.566 7.554,-16.782 ; 7.66,16.846 7.811,16.846 7.939,16.974 7.788,16.974 7.66,16.846 ; 8.133,-6.827 8.706,-6.827 ; 8.133,-6.827 8.595,-7.289 11.388,-7.289 11.821,-6.856 ; 8.151,-36.769 9.585,-36.769 ; 8.151,-36.769 8.868,-36.052 9.585,-36.769 ; 8.151,-31.561 8.868,-32.278 9.585,-31.561 ; 8.151,-31.561 9.585,-31.561 ; 8.706,-6.827 9.102,-6.827 ; 8.99,-0.119 16.509,-0.119 17.669,1.041 17.826,1.041 17.826,-0.391 17.565,-0.652 16.697,-0.652 ; 8.99,-0.119 9.212,-0.341 ; 8.99,-0.119 8.99,-0.341 9.212,-0.341 ; 8.99,-0.119 8.99,0.435 16.475,0.435 17.875,1.835 19.316,1.835 19.316,-1.085 ; 9.102,-6.827 9.512,-6.417 9.512,-6.264 13.961,-6.264 15.525,-6.264 16.689,-7.428 ; 9.102,-6.827 9.691,-6.827 9.72,-6.856 11.821,-6.856 ; 9.212,-0.341 9.244,-0.373 9.244,-1.605 8.912,-1.937 9.244,-2.27 9.244,-3.28 8.814,-3.71 13.825,-3.71 16.13,-1.405 ; 9.285,15.375 9.285,16.284 ; 9.285,15.375 11.01,17.1 11.01,19.116 7.956,19.116 7.931,19.091 3.083,19.091 3.058,19.116 2.515,19.116 2.515,12.205 3.623,13.313 3.75,13.44 9.031,13.44 8.067,14.404 8.067,15.066 9.285,16.284 ; 9.285,16.284 9.285,16.854 10.091,17.66 9.591,17.66 ; 9.285,16.284 10.37,17.369 10.37,18.463 3.136,18.463 3.124,18.451 3.17,18.405 3.17,13.624 7.415,13.624 7.718,13.927 7.718,14.951 7.66,15.009 7.66,15.404 9.591,17.335 9.591,17.66 ; 9.585,-36.769 10.691,-36.769 ; 9.585,-31.561 10.691,-31.561 ; 10.691,-36.769 12.125,-36.769 ; 10.691,-36.769 11.408,-36.052 12.125,-36.769 ; 10.691,-31.561 11.408,-32.278 12.125,-31.561 ; 10.691,-31.561 12.125,-31.561 ; 11.215,13.839 12.614,13.839 12.658,13.795 12.658,14.305 ; 11.215,13.839 11.215,14.575 12.94,16.3 12.94,19.116 13.117,19.116 13.459,19.458 13.459,21.866 13.135,22.19 ; 11.215,13.839 11.215,13.357 11.257,13.315 17.006,13.315 17.006,14.255 ; 11.821,-6.856 12.831,-6.856 ; 12.125,-36.769 13.231,-36.769 ; 12.125,-31.561 13.231,-31.561 ; 12.658,14.305 16.049,14.305 17.006,15.262 ; 12.658,14.305 11.858,14.305 11.68,14.483 11.824,14.483 12.658,15.317 12.658,14.305 ; 12.831,-6.856 13.312,-6.856 ; 12.844,3.865 12.921,3.942 ; 12.844,3.865 13.55,3.865 13.627,3.942 12.921,3.942 ; 12.844,3.865 12.844,4.054 13.24,4.45 13.24,7.32 13.25,7.33 ; 12.921,3.942 12.954,3.975 13.66,3.975 18.35,8.665 19.316,8.665 19.316,11.367 19.334,11.385 17.025,11.385 16.725,11.085 ; 13.001,10.391 6.392,10.391 6.392,10.762 6.509,10.879 6.597,10.791 13.401,10.791 ; 13.001,10.391 13.401,10.791 ; 13.231,-36.769 14.665,-36.769 ; 13.231,-36.769 13.948,-36.052 14.665,-36.769 ; 13.231,-31.561 13.948,-32.278 14.665,-31.561 ; 13.231,-31.561 14.665,-31.561 ; 13.25,7.33 13.494,7.574 13.494,7.795 ; 13.25,7.33 13.24,7.34 13.24,7.541 13.494,7.795 ; 13.25,7.33 13.683,6.897 13.683,4.707 18.049,9.073 18.758,9.073 18.758,11.083 18.739,11.102 18.522,10.885 17.071,10.885 16.9,10.714 ; 13.312,-6.856 13.312,-6.751 13.417,-6.856 ; 13.312,-6.856 13.312,-6.943 14.86,-8.491 17.15,-8.491 16.689,-8.03 16.689,-7.429 ; 13.312,-6.856 13.417,-6.856 ; 13.417,-6.856 13.529,-6.968 13.811,-6.968 ; 13.417,-6.856 13.699,-6.856 13.811,-6.968 ; 13.494,7.795 13.494,8.154 13.529,8.154 ; 13.494,7.795 13.529,7.83 13.529,8.154 ; 13.529,8.154 13.529,8.19 16.424,11.085 ; 13.803,-14.445 13.958,-14.445 14.779,-15.266 14.779,-18.683 14.6,-18.862 14.992,-19.254 15.243,-19.254 15.243,-18.132 ; 13.803,-14.445 14.089,-14.731 14.089,-18.873 14.078,-18.862 13.458,-18.862 13.458,-14.064 12.862,-13.468 12.862,-18.79 12.814,-18.838 12.196,-18.838 12.362,-18.672 12.362,-12.802 12.255,-12.695 11.862,-12.695 11.862,-18.612 11.684,-18.79 11.196,-18.79 11.196,-13.349 11.612,-12.933 11.326,-12.647 11.041,-12.647 10.648,-13.04 10.648,-18.85 10.041,-18.85 10.112,-18.779 10.112,-12.754 10.814,-12.052 12.339,-12.052 12.339,-12.076 15.519,-15.256 16.02,-15.256 ; 13.811,-6.968 14.665,-6.968 15.513,-6.968 16.242,-7.697 16.19,-7.749 16.19,-8.004 15.346,-8.004 14.86,-7.518 ; 13.811,-6.968 14.361,-7.518 14.86,-7.518 ; v1(14.6,23.15) v1@16.25,23.15 ; v1(14.6,23.15) 14.6,21.625 v1(14.625,21.6) ; v1(14.625,21.6) 14.663,21.638 v1@16.25,21.638 ; v1(14.625,21.6) 14.725,21.5 14.725,19.95 16.25,19.95 v1(16.3,20) ; 14.665,-36.769 15.771,-36.769 ; 14.665,-36.769 14.689,-36.793 15.747,-36.793 15.771,-36.769 ; 14.665,-31.561 15.771,-31.561 ; 14.86,-7.518 15.448,-7.518 15.384,-7.454 14.796,-7.454 14.86,-7.518 ; 15.003,-1.865 14.324,-1.865 14.366,-1.823 14.366,-1.133 14.481,-1.018 15.15,-1.018 14.784,-1.384 14.784,-1.405 15.463,-1.405 ; 15.003,-1.865 15.484,-1.865 15.944,-1.405 ; 15.003,-1.865 13.927,-2.941 13.885,-2.941 13.885,-0.757 14.105,-0.537 16.571,-0.537 17.376,0.268 17.376,0.069 17.397,0.048 16.697,-0.652 ; 15.003,-1.865 15.463,-1.405 ; 15.243,-18.132 15.243,-16.033 15.306,-15.97 ; 15.306,-15.97 15.418,-15.858 ; 15.306,-15.97 15.306,-16.98 16.02,-17.694 17.03,-17.694 17.538,-17.186 18.855,-17.186 22.546,-20.876 ; 15.306,-15.97 15.306,-15.674 15.418,-15.786 15.418,-15.858 ; 15.418,-15.858 16.02,-15.256 ; 15.463,-1.405 16.216,-0.652 16.697,-0.652 ; 15.463,-1.405 15.944,-1.405 ; 15.659,-22.284 15.605,-22.231 15.605,-19.967 16.048,-19.524 16.048,-19.18 16.357,-18.871 18.28,-18.871 20.759,-21.35 ; 15.659,-22.284 15.861,-22.487 17.358,-22.487 18.971,-20.874 19.502,-20.874 18.138,-19.51 18.138,-19.49 16.627,-19.49 16.566,-19.429 16.162,-19.833 16.162,-21.667 16.068,-21.761 16.125,-21.818 ; 15.659,-22.284 16.125,-21.818 ; 15.659,-22.284 15.517,-22.426 11.808,-22.426 11.62,-22.614 14.901,-22.614 16.012,-23.725 ; 15.771,-36.769 17.205,-36.769 ; 15.771,-36.769 16.488,-36.052 17.205,-36.769 ; 15.771,-31.561 16.488,-32.278 17.205,-31.561 ; 15.771,-31.561 17.205,-31.561 ; 15.944,-1.405 16.697,-0.652 ; 15.944,-1.405 16.13,-1.405 ; 16.012,-23.725 18.301,-26.014 18.505,-26.014 18.799,-25.72 17.986,-24.906 17.986,-23.094 18.914,-22.166 19.486,-22.166 19.846,-21.806 23.014,-21.806 23.269,-22.061 23.663,-22.061 23.958,-22.356 23.506,-22.808 23.408,-22.808 ; 16.012,-23.725 16.825,-23.725 19.2,-21.35 20.759,-21.35 ; 16.02,-15.256 17.03,-15.256 17.538,-15.764 19.445,-15.764 20.127,-16.446 ; 16.125,-21.818 16.229,-21.922 17.191,-21.922 18.434,-20.679 18.602,-20.679 18.058,-20.135 16.768,-20.135 16.761,-20.128 16.673,-20.216 16.673,-21.27 ; 16.125,-21.818 16.673,-21.27 ; 16.13,-1.405 16.45,-1.085 18.495,-1.085 ; v1@16.25,21.638 v1@16.25,23.15 ; v1@16.25,21.638 16.25,20.05 v1(16.3,20) ; v1@16.25,21.638 v1(16.275,21.638) v1(17.779,21.638) v1@17.793,21.638 ; v1@16.25,23.15 v1@17.793,23.15 ; v1(16.3,20) v1(17.793,20) ; 16.424,11.085 16.62,11.28 16.638,11.298 ; 16.424,11.085 16.62,11.085 16.638,11.085 ; 16.638,11.085 16.638,11.298 ; 16.638,11.085 16.638,10.976 16.725,10.889 ; 16.638,11.085 16.725,11.085 ; 16.638,11.298 16.725,11.385 16.725,11.085 ; 16.673,-21.27 16.673,-21.317 17.104,-21.317 17.668,-20.753 17.338,-20.753 17.264,-20.679 16.673,-21.27 ; 16.689,-7.428 17.048,-7.07 17.348,-6.769 ; 16.689,-7.428 17.688,-8.427 18.634,-8.427 18.634,-7.621 18.634,-3.706 18.724,-3.616 17.405,-3.616 15.87,-5.151 15.73,-5.151 17.348,-6.769 ; 16.725,10.889 16.725,11.085 ; 16.725,10.889 16.9,10.714 ; 16.9,10.714 17.366,10.248 ; 16.9,10.714 13.998,7.812 13.998,7.596 13.873,7.471 13.873,6.04 14.083,5.83 17.786,9.533 18.194,9.533 18.194,10.261 17.379,10.261 17.366,10.248 ; 17.006,14.255 17.006,14.787 ; 17.006,14.255 17.589,14.838 17.589,15.37 ; 17.006,14.787 17.006,15.262 ; 17.006,14.787 17.589,15.37 ; 17.006,15.262 17.006,17.823 17.594,18.411 19.312,18.411 19.77,18.869 20.78,18.869 21.438,18.211 27.162,18.211 27.232,18.281 27.984,18.281 27.914,18.211 27.72,18.211 28.453,17.478 28.453,22.959 28.612,23.118 28.612,25.793 29.619,25.793 ; 17.006,15.262 17.589,15.845 ; 17.075,3.765 15.915,2.605 15.675,2.365 14.78,2.365 15.02,2.605 19.15,6.735 19.316,6.735 19.316,6.137 19.316,5.491 19.316,3.765 17.59,3.765 ; 17.075,3.765 17.319,4.009 17.319,4.198 18.708,5.587 18.8,5.587 18.8,5.457 ; 17.075,3.765 17.59,3.765 ; 17.205,-36.769 18.311,-36.769 ; 17.205,-31.561 18.311,-31.561 ; 17.348,-6.769 17.662,-6.456 17.662,-4.691 17.278,-5.075 17.278,-5.254 17.47,-5.062 17.611,-5.062 17.611,-6.252 16.549,-5.19 16.549,-5.138 17.419,-4.268 18.122,-4.268 18.161,-4.307 18.097,-4.371 18.097,-7.084 18.097,-7.928 17.88,-7.928 17.585,-7.633 17.585,-7.07 17.585,-7.006 17.348,-6.769 ; 17.366,10.248 14.727,7.609 14.477,7.609 14.208,7.34 14.208,6.814 17.215,9.821 17.793,9.821 17.366,10.248 ; 17.589,15.37 17.589,15.845 ; 17.589,15.845 17.589,17.464 17.93,17.805 17.941,17.794 19.056,17.794 19.056,17.145 19.115,17.086 18.454,17.086 18.373,17.167 18.255,17.167 18.146,17.058 18.146,16.474 18.182,16.438 ; 17.589,15.845 18.182,16.438 ; v1(17.793,20) v1@17.793,21.638 ; v1(17.793,20) v1(19.286,20) ; v1@17.793,21.638 v1@17.793,23.15 ; v1@17.793,21.638 v1@19.243,21.638 ; v1@17.793,23.15 v1@19.243,23.15 ; 18.311,-36.769 19.745,-36.769 ; 18.311,-36.769 19.028,-36.052 19.745,-36.769 ; 18.311,-31.561 19.028,-32.278 19.745,-31.561 ; 18.311,-31.561 19.745,-31.561 ; 18.495,-1.085 19.316,-1.085 ; 18.495,-1.085 18.233,-0.823 18.233,1.292 18.264,1.261 18.861,1.261 18.861,-0.63 19.316,-1.085 ; 18.8,5.457 18.8,4.975 18.8,4.476 18.893,4.383 18.782,4.272 18.578,4.272 18.411,4.439 18.411,4.586 18.411,5.068 18.8,5.457 ; 19.095,-27.436 19.674,-26.857 ; 19.095,-27.436 21.105,-27.436 21.203,-27.338 21.203,-27.238 20.822,-26.857 ; v1@19.243,21.638 v1@19.243,23.15 ; v1@19.243,21.638 19.243,20.043 v1(19.286,20) ; v1@19.243,21.638 v1(19.282,21.638) v1@20.779,21.638 ; v1@19.243,23.15 v1@20.779,23.15 ; v1(19.286,20) v1(20.779,20) ; 19.674,-26.857 20.822,-26.857 ; 19.674,-26.857 20.284,-26.247 20.284,-25.776 20.84,-25.22 21.454,-25.834 22.766,-25.834 23.694,-24.906 CE.1@23.694,-23.283 ; 19.745,-36.769 20.851,-36.769 ; 19.745,-31.561 20.851,-31.561 ; 19.905,41.505 19.905,43.248 ; 19.905,41.505 20.298,41.898 20.298,42.855 ; 19.905,41.505 19.287,40.887 19.287,37.07 19.652,37.07 19.82,37.238 20.214,37.238 20.298,37.322 ; 19.905,41.505 19.905,37.434 20.017,37.322 20.298,37.322 ; 19.905,43.248 20.298,42.855 ; 20.127,-16.446 20.644,-16.963 ; 20.127,-16.446 20.127,-15.646 20.29,-15.809 20.644,-15.809 20.644,-16.963 ; 20.298,37.322 20.972,37.996 ; 20.298,37.322 22.7,37.322 ; 20.298,42.855 22.672,40.482 22.672,38.489 22.179,37.996 20.972,37.996 ; 20.443,44.722 20.443,45.139 ; 20.443,44.722 20.144,45.021 -25.993,45.021 -26.11,45.139 20.443,45.139 ; 20.443,44.722 20.737,44.428 ; 20.443,45.139 37.377,45.139 37.387,45.129 37.387,44.559 31.694,44.559 31.646,44.511 31.757,44.4 31.757,43.576 32.026,43.576 ; 20.644,-16.963 21.202,-17.521 ; 20.668,-22.607 21.012,-22.607 ; 20.668,-22.607 20.84,-22.78 21.012,-22.607 ; 20.737,44.428 24.429,40.736 24.429,36.707 24.753,36.383 24.798,36.383 25.811,35.37 25.811,34.223 26.913,34.223 27.536,33.6 27.79,33.855 28.912,33.855 ; 20.737,44.428 24.094,44.428 24.275,44.609 24.275,42.416 ; 20.747,40.016 20.747,40.298 20.971,40.298 ; 20.747,40.016 20.747,38.978 21.112,38.613 21.589,38.613 ; 20.747,40.016 20.578,40.185 20.578,40.691 20.971,40.298 ; 20.747,40.016 21.308,39.455 21.308,39.203 21.393,39.203 21.589,39.399 21.589,39.68 ; 20.759,-21.35 v1(23.85,-21.35) 24.65,-22.15 24.65,-22.327 ; v1(20.779,20) v1@20.779,21.638 ; v1(20.779,20) v1(22.271,20) ; v1@20.779,21.638 v1@20.779,23.15 ; v1@20.779,21.638 v1(20.786,21.638) v1@22.236,21.638 ; v1@20.779,23.15 v1@22.236,23.15 ; 20.822,-26.857 21.993,-26.857 ; 20.851,-36.769 21.568,-36.052 22.285,-36.769 ; 20.851,-36.769 22.285,-36.769 ; 20.971,40.298 21.224,40.298 21.589,39.933 21.589,39.68 ; 20.971,40.298 21.589,39.68 ; 20.972,37.996 21.589,38.613 ; 20.972,37.996 20.662,37.996 20.354,38.304 20.354,41.87 21.702,40.522 21.954,40.522 22.207,40.269 22.207,38.726 22.094,38.613 21.589,38.613 ; 21.012,-22.607 21.454,-22.166 22.766,-22.166 23.408,-22.808 ; 21.104,-26.262 20.81,-26.262 20.81,-26.154 20.908,-26.056 20.908,-26.066 21.104,-26.262 ; 21.104,-26.262 21.285,-26.443 22.266,-26.443 22.061,-26.647 22.061,-26.788 21.993,-26.857 ; 21.202,-17.521 21.202,-15.722 21.672,-15.722 21.742,-15.792 21.672,-15.862 21.672,-17.991 ; 21.202,-17.521 21.672,-17.991 ; 21.589,38.613 21.898,38.922 21.898,39.371 21.589,39.68 ; 21.672,-17.991 22.353,-18.673 ; 21.862,-31.29 21.862,-30.915 21.862,-30.32 21.666,-30.124 21.666,-27.183 21.993,-26.857 ; v1@22.236,21.638 v1@22.236,23.15 ; v1@22.236,21.638 22.236,20.036 v1(22.271,20) ; v1@22.236,21.638 v1(22.289,21.638) v1@23.764,21.638 ; v1@22.236,23.15 v1@23.764,23.15 ; v1(22.271,20) v1(23.764,20) ; 22.276,-12.959 22.276,-12.819 22.424,-12.671 22.564,-12.671 22.276,-12.959 ; 22.276,-12.959 22.276,-13.45 21.987,-13.739 22.412,-13.739 23.045,-13.106 vc10.2@24.055,-13.106 ; 22.276,-12.959 22.084,-13.151 22.084,-12.678 22.535,-12.227 22.535,-5.221 22.961,-4.795 22.961,7.82 22.195,8.586 22.084,8.586 22.084,8.892 22.034,8.942 22.034,9.033 22.084,9.083 22.084,11.367 21.966,11.485 21.964,11.487 22.084,11.608 22.084,13.892 21.742,14.234 19.658,14.234 19.444,14.02 19.444,14.349 19.011,14.782 19.011,15.255 19.42,15.664 22.609,15.664 22.616,15.657 22.616,15.289 ; 22.285,-36.769 23.391,-36.769 ; 22.331,-17.07 22.638,-16.763 22.331,-16.455 ; 22.331,-17.07 22.331,-16.455 ; 22.331,-17.07 22.331,-18.364 22.353,-18.386 22.353,-18.673 ; 22.372,14.583 22.372,11.485 22.372,8.64 22.498,8.766 22.498,14.457 22.372,14.583 ; 22.372,14.583 22.372,14.967 ; 22.372,14.583 22.283,14.672 19.704,14.672 19.704,15.086 19.733,15.115 19.881,14.967 22.372,14.967 ; 22.372,14.967 22.372,15.045 22.616,15.289 ; 22.372,14.967 22.616,14.967 22.616,15.289 ; 22.7,37.322 22.7,40.454 23.007,40.146 23.007,37.154 22.839,37.322 22.7,37.322 ; 23.391,-36.769 24.825,-36.769 ; 23.391,-36.769 24.108,-36.052 24.825,-36.769 ; 23.408,-22.808 23.694,-23.094 CE.1@23.694,-23.283 ; vt1.1@23.5,-7.45 vt4.1@23.5,-4.925 ; vt1.1@23.5,-7.45 25.425,-7.45 25.475,-7.4 25.475,-5.825 24.95,-5.3 23.875,-5.3 vt4.1@23.5,-4.925 ; vt4.1@23.5,-4.925 vx8.1@23.5,-2.4 vx9.1@23.5,0.125 vc2.2@23.5,2.65 vc5.2@23.5,5.175 vt8.1@23.5,7.7 ; vt8.1@23.5,7.7 25.05,7.7 25.8,8.45 v1(25.8,9.975) ; vt8.1@23.5,7.7 vt5.1@23.5,10.225 ; vt5.1@23.5,10.225 23.5,11.337 ; vt5.1@23.5,10.225 23.75,9.975 v1(25.8,9.975) ; 23.5,11.337 25.536,11.337 v1(25.775,11.576) ; 23.5,11.337 vc12.2@23.5,12.75 vc12.2@23.5,13.225 ; vc12.2@23.5,13.225 23.5,14.864 v1(23.539,14.903) 25.738,14.903 v1(25.776,14.865) ; vc12.2@23.5,13.225 23.55,13.175 v1(25.775,13.175) ; CE.1@23.694,-23.283 24.65,-22.327 ; v1(23.764,20) v1@23.764,21.638 ; v1(23.764,20) v1(25.257,20) ; v1@23.764,21.638 v1@23.764,23.15 ; v1@23.764,21.638 v1(23.793,21.638) v1@25.229,21.638 ; v1@23.764,23.15 v1@25.229,23.15 ; 23.811,42.88 23.811,43.894 23.713,43.796 21.745,43.796 23.972,41.569 24.29,41.569 24.275,41.584 24.275,42.416 ; 23.811,42.88 23.811,42.577 23.67,42.577 22.978,43.269 23.34,43.269 23.381,43.31 23.811,42.88 ; 23.811,42.88 24.275,42.416 ; vc10.2@24.055,-13.106 24.231,-13.106 24.82,-13.696 ; vc10.2@24.055,-13.106 24.769,-13.82 ; 24.075,31.555 24.373,31.555 24.544,31.726 24.873,31.396 ; 24.275,42.416 28.827,37.864 ; 24.513,-15.188 24.769,-15.188 24.853,-15.272 24.853,-13.728 24.82,-13.696 ; 24.769,-13.82 24.769,-13.747 24.82,-13.696 ; 24.82,-13.696 24.853,-13.663 24.345,-13.155 24.345,-12.145 24.715,-11.775 24.345,-11.405 24.345,-10.395 24.682,-10.058 24.345,-9.721 24.345,-8.645 24.553,-8.437 24.553,-7.984 25.006,-7.984 25.059,-7.931 26.095,-7.931 ; 24.825,-36.769 25.931,-36.769 ; v1@25.229,21.638 v1@25.229,23.15 ; v1@25.229,21.638 25.229,20.029 v1(25.257,20) ; v1@25.229,21.638 v1(25.296,21.638) v1@26.725,21.638 ; v1@25.229,23.15 26.6,23.15 v1(26.725,23.275) v1@26.725,21.638 ; v1(25.257,20) v1(26.75,20) 26.725,20.025 v1@26.725,21.638 ; v1(25.775,11.576) v1(25.775,13.175) ; v1(25.775,11.576) 25.775,10 v1(25.8,9.975) ; v1(25.775,13.175) 25.776,13.176 v1(25.776,14.865) ; v1(25.776,14.865) 27.101,14.865 27.539,15.303 27.539,-7.486 ; 25.821,28.841 25.906,28.756 ; 25.906,28.756 26.916,28.756 ; 25.931,-36.769 26.66,-36.04 ; 25.931,-36.769 26.615,-36.769 ; 26.034,37.864 26.034,34.879 26.294,34.619 27.157,34.619 27.498,34.278 27.53,34.31 27.815,34.31 27.815,34.359 27.587,34.587 27.587,34.684 27.286,34.985 27.311,35.01 27.969,35.01 27.969,34.798 28.912,33.855 ; 26.034,37.864 28.827,37.864 ; 26.034,37.864 25.579,37.864 25.514,37.799 25.514,36.319 24.953,36.88 24.953,38.23 25.131,38.408 26.034,38.408 26.034,37.864 ; 26.095,-7.931 26.614,-8.45 26.614,-8.475 26.652,-8.514 26.87,-8.514 27.539,-9.183 27.539,-7.486 ; 26.095,-7.931 27.094,-7.931 27.539,-7.486 ; 26.615,-36.769 26.66,-36.724 26.66,-36.04 ; 26.615,-36.769 26.591,-36.793 32.078,-36.793 32.249,-36.622 32.249,-34.926 31.626,-34.303 31.626,-33.197 32.275,-32.548 32.249,-32.522 32.249,-32.386 31.626,-31.763 31.626,-30.736 31.18,-30.736 28.785,-28.341 28.785,-29.511 28.514,-29.782 28.514,-29.933 ; 26.615,-36.769 29.823,-36.769 29.314,-36.26 ; 26.66,-36.04 26.712,-35.988 ; 26.699,-33.461 26.699,-33.948 26.788,-33.859 26.862,-33.859 ; 26.699,-33.461 26.712,-33.448 26.712,-32.342 ; 26.699,-33.461 26.433,-33.727 25.995,-34.165 26.712,-34.882 26.712,-35.988 ; 26.712,-35.988 27.211,-35.489 ; 26.712,-32.342 26.367,-31.997 26.588,-31.776 26.588,-31.709 26.874,-31.709 ; 26.712,-32.342 26.712,-31.871 26.874,-31.709 ; 26.862,-33.859 26.913,-33.859 ; 26.862,-33.859 26.862,-33.808 26.913,-33.859 ; 26.862,-33.859 26.862,-33.899 26.816,-33.945 27.211,-34.34 ; 26.874,-31.709 26.918,-31.665 ; 26.913,-33.859 27.211,-33.859 ; 26.913,-33.859 27.211,-34.157 ; 26.916,28.756 27.318,29.158 ; 26.916,28.756 26.974,28.756 27.376,29.158 27.318,29.158 ; 26.918,-31.665 27.203,-31.38 27.3,-31.38 27.574,-31.106 ; 26.918,-31.665 27.526,-31.665 28.274,-32.413 27.3,-32.413 27.211,-32.324 27.211,-33.859 ; 27.211,-35.489 27.521,-35.179 27.556,-35.144 ; 27.211,-35.489 27.211,-34.869 27.211,-34.34 ; 27.211,-35.489 27.211,-36.141 27.142,-36.21 27.192,-36.26 29.314,-36.26 ; 27.211,-34.34 27.556,-34.685 27.556,-35.144 ; 27.211,-34.34 27.211,-34.157 ; 27.211,-34.157 27.877,-34.823 ; 27.211,-34.157 27.211,-33.859 ; 27.211,-33.859 28.717,-33.859 ; 27.318,29.158 27.63,29.47 27.63,30.48 27.396,30.714 35.48,30.714 35.982,30.213 35.982,29.179 35.355,29.179 35.614,29.438 35.614,30.197 35.484,30.327 35.484,30.381 35.116,30.013 35.116,29.179 ; 27.556,-35.144 27.877,-34.823 ; 27.574,-31.106 28.096,-30.583 ; 27.574,-31.106 27.725,-31.106 28.717,-32.098 ; 27.877,-34.823 28.241,-35.187 ; 27.877,-34.823 28.024,-34.676 ; 28.024,-34.676 31.402,-34.676 31.402,-35.187 ; 28.024,-34.676 27.821,-34.676 27.722,-34.577 27.722,-33.997 27.781,-33.938 27.968,-34.125 28.575,-34.125 ; 28.024,-34.676 28.575,-34.125 ; 28.096,-30.583 28.35,-30.33 ; 28.096,-30.583 28.717,-31.204 ; 28.241,-35.187 31.402,-35.187 ; 28.241,-35.187 27.9,-35.187 27.762,-35.049 27.703,-35.108 27.703,-35.699 28.753,-35.699 ; 28.241,-35.187 28.753,-35.699 ; 28.35,-30.33 28.35,-30.097 28.514,-29.933 ; 28.35,-30.33 28.514,-30.166 28.514,-29.933 ; 28.514,-29.933 28.717,-29.73 28.717,-31.204 ; 28.575,-34.125 30.959,-34.125 31.176,-33.908 31.176,-33.465 30.763,-33.465 ; 28.575,-34.125 28.717,-33.983 28.717,-33.859 ; 28.717,-33.859 28.717,-33.465 ; 28.717,-33.859 30.369,-33.859 30.763,-33.465 ; 28.717,-33.465 28.717,-32.993 ; 28.717,-33.465 30.763,-33.465 ; 28.717,-33.465 27.831,-33.465 27.781,-33.515 27.673,-33.407 27.673,-32.993 28.717,-32.993 ; 28.717,-32.993 28.717,-32.098 ; 28.717,-32.993 30.92,-32.993 31.372,-32.541 28.912,-32.541 29.277,-32.176 29.277,-32.029 31.126,-32.029 31.264,-32.167 31.264,-32.098 ; 28.717,-32.098 28.746,-32.127 28.746,-31.233 28.717,-31.204 ; 28.717,-32.098 28.717,-31.204 ; 28.753,-35.699 30.93,-35.699 31.008,-35.777 31.402,-35.383 31.402,-35.187 ; 28.753,-35.699 29.314,-36.26 ; 28.827,37.864 v1@31.579,35.112 ; 29.314,-36.26 31.609,-36.26 31.609,-35.354 31.776,-35.187 31.402,-35.187 ; 29.619,25.793 29.92,26.094 30.138,26.094 ; 30.138,26.094 30.073,26.159 30.073,28.877 32.038,28.877 ; 30.138,26.094 30.598,26.094 ; 30.333,18.548 v1@30.333,18.92